# Altium PCB CAMERA_SHEILD_PCB.PcbDoc
Units mil, origin at the board's own origin, x right, y up, seen from the top; angles counter-clockwise.
Board outline 1750 x 2100 mil, 2 copper layers (Top Layer, Bottom Layer); 31 components, 29 nets, 109 pads, 36 vias.
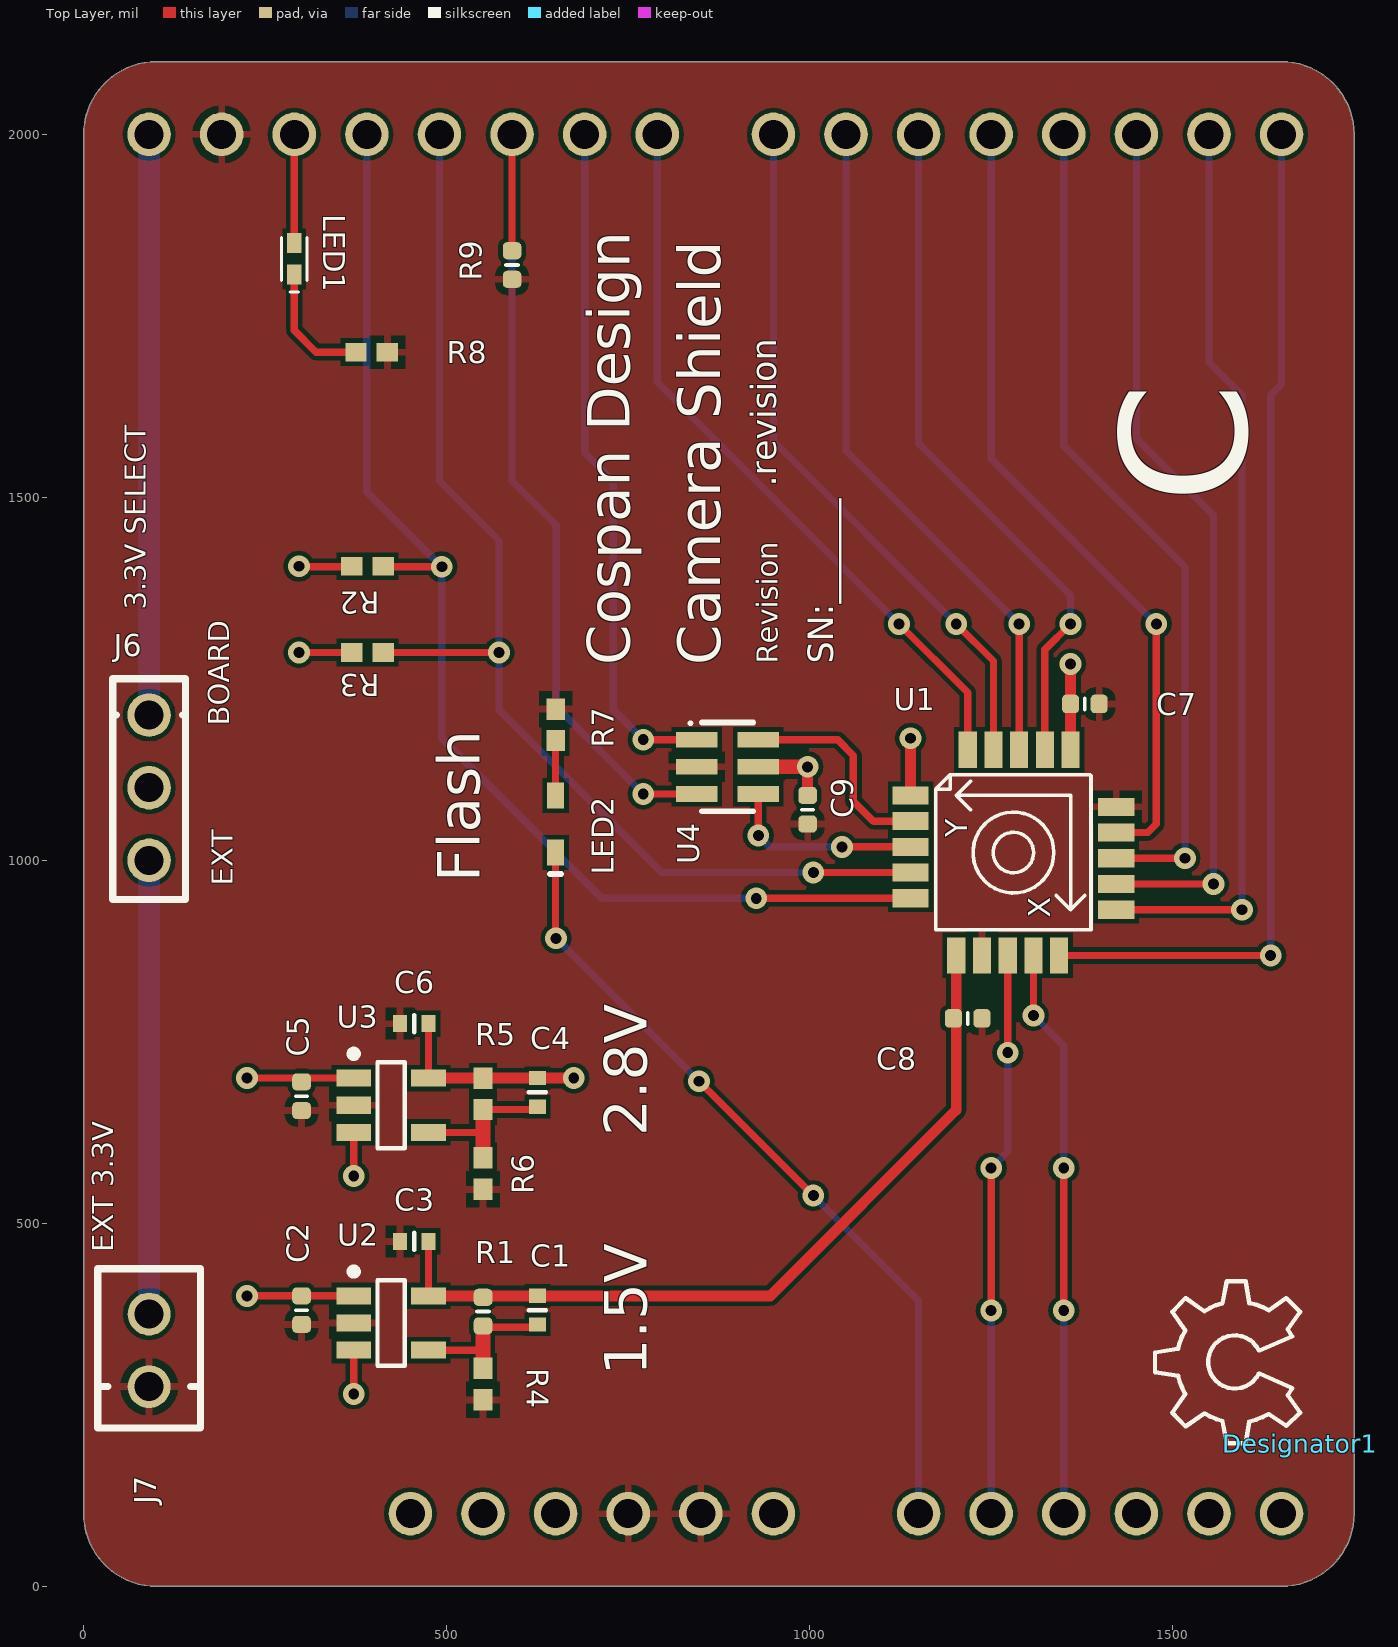
[diagram p0: Top Layer view]
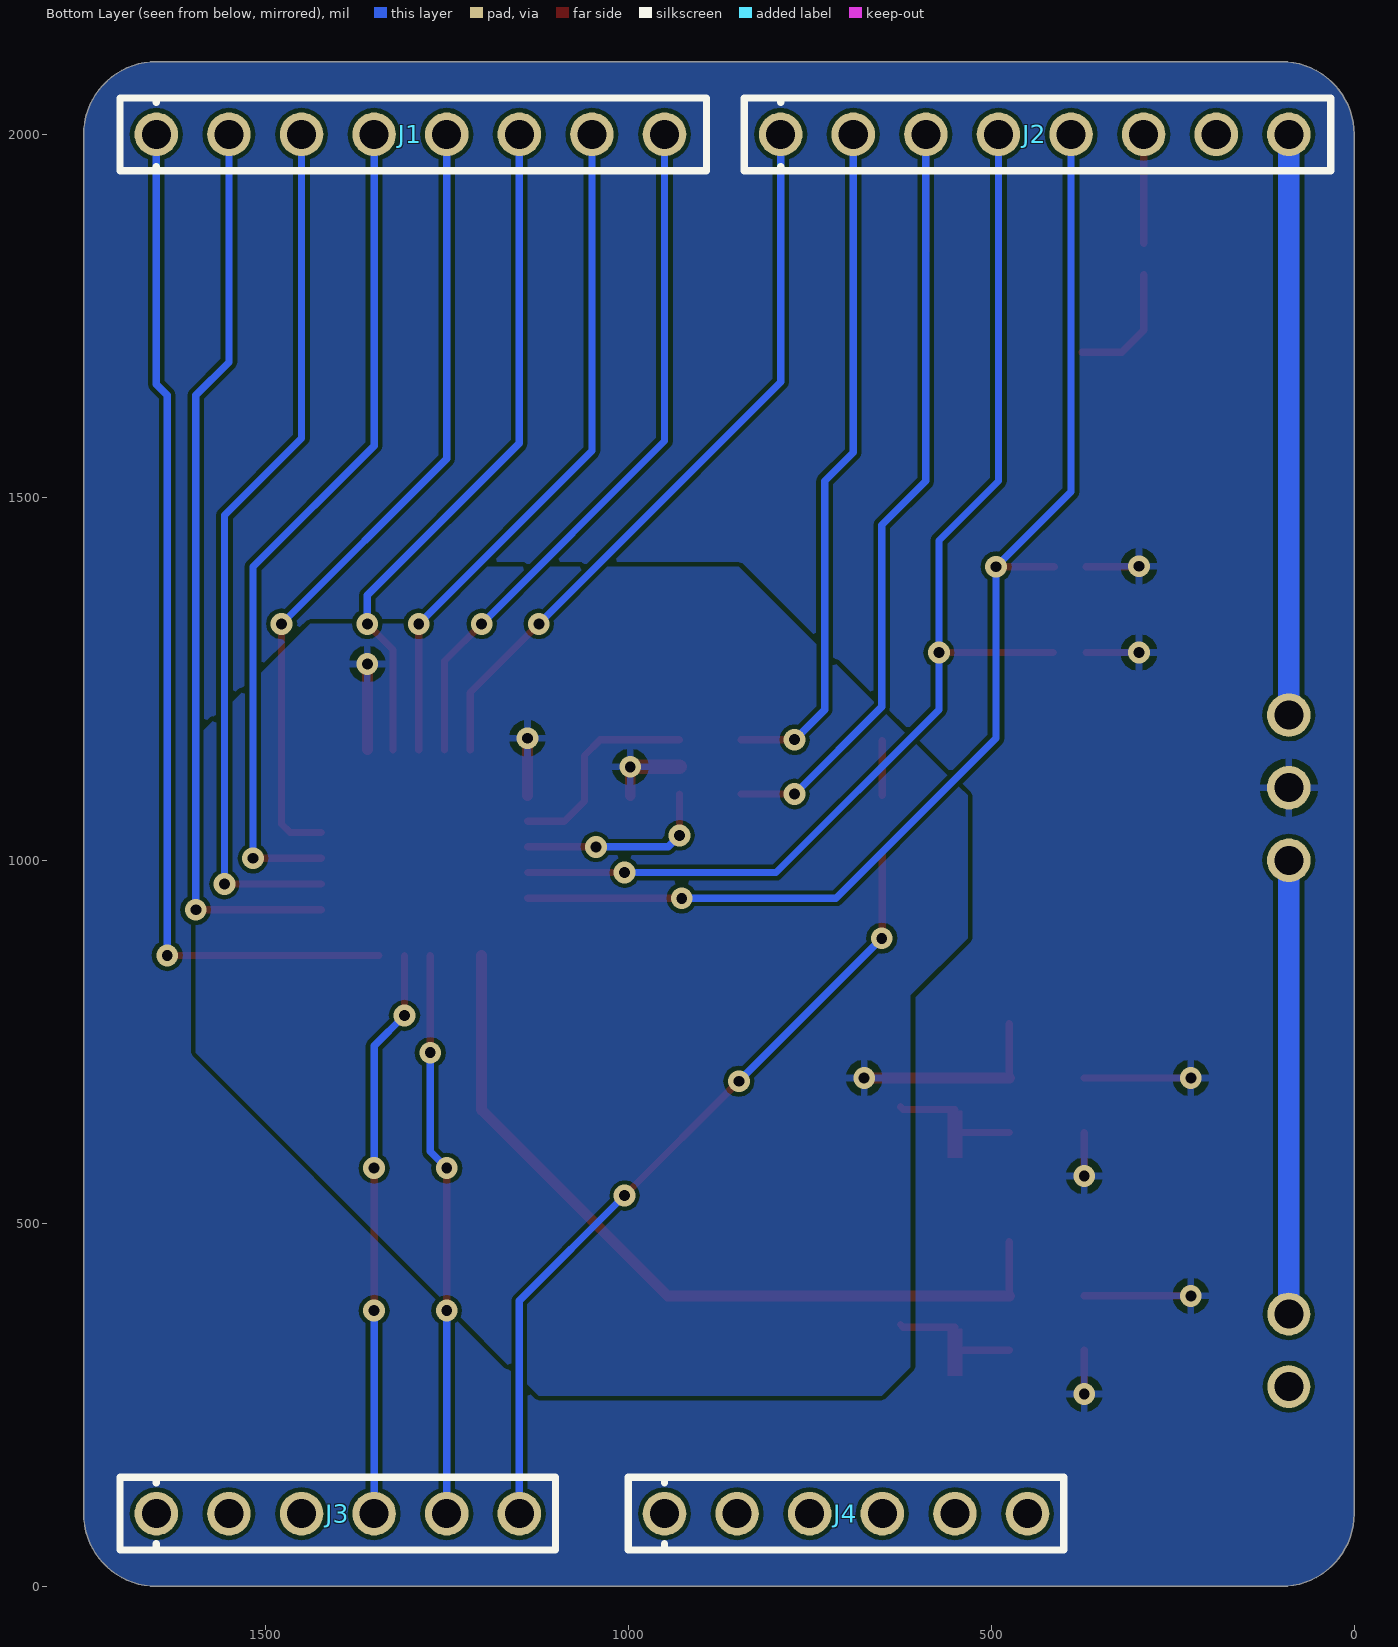
[diagram p1: Bottom Layer view, seen from below]
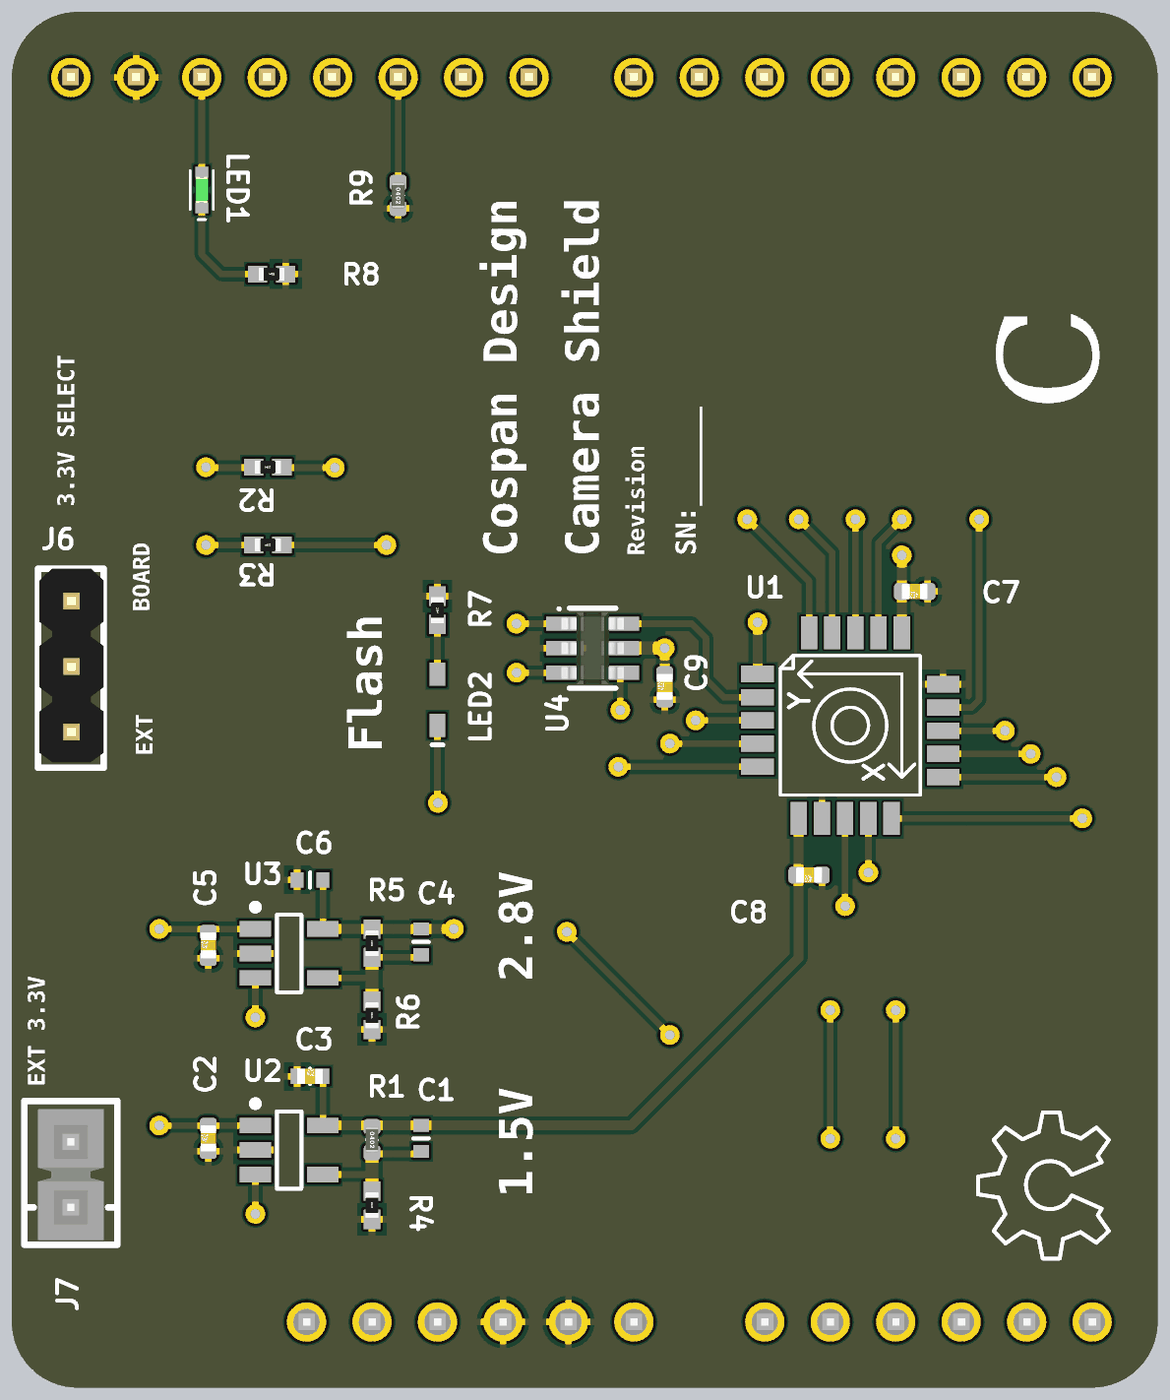
[diagram p2: 3D render of the assembled board from above, using the file's embedded part models]
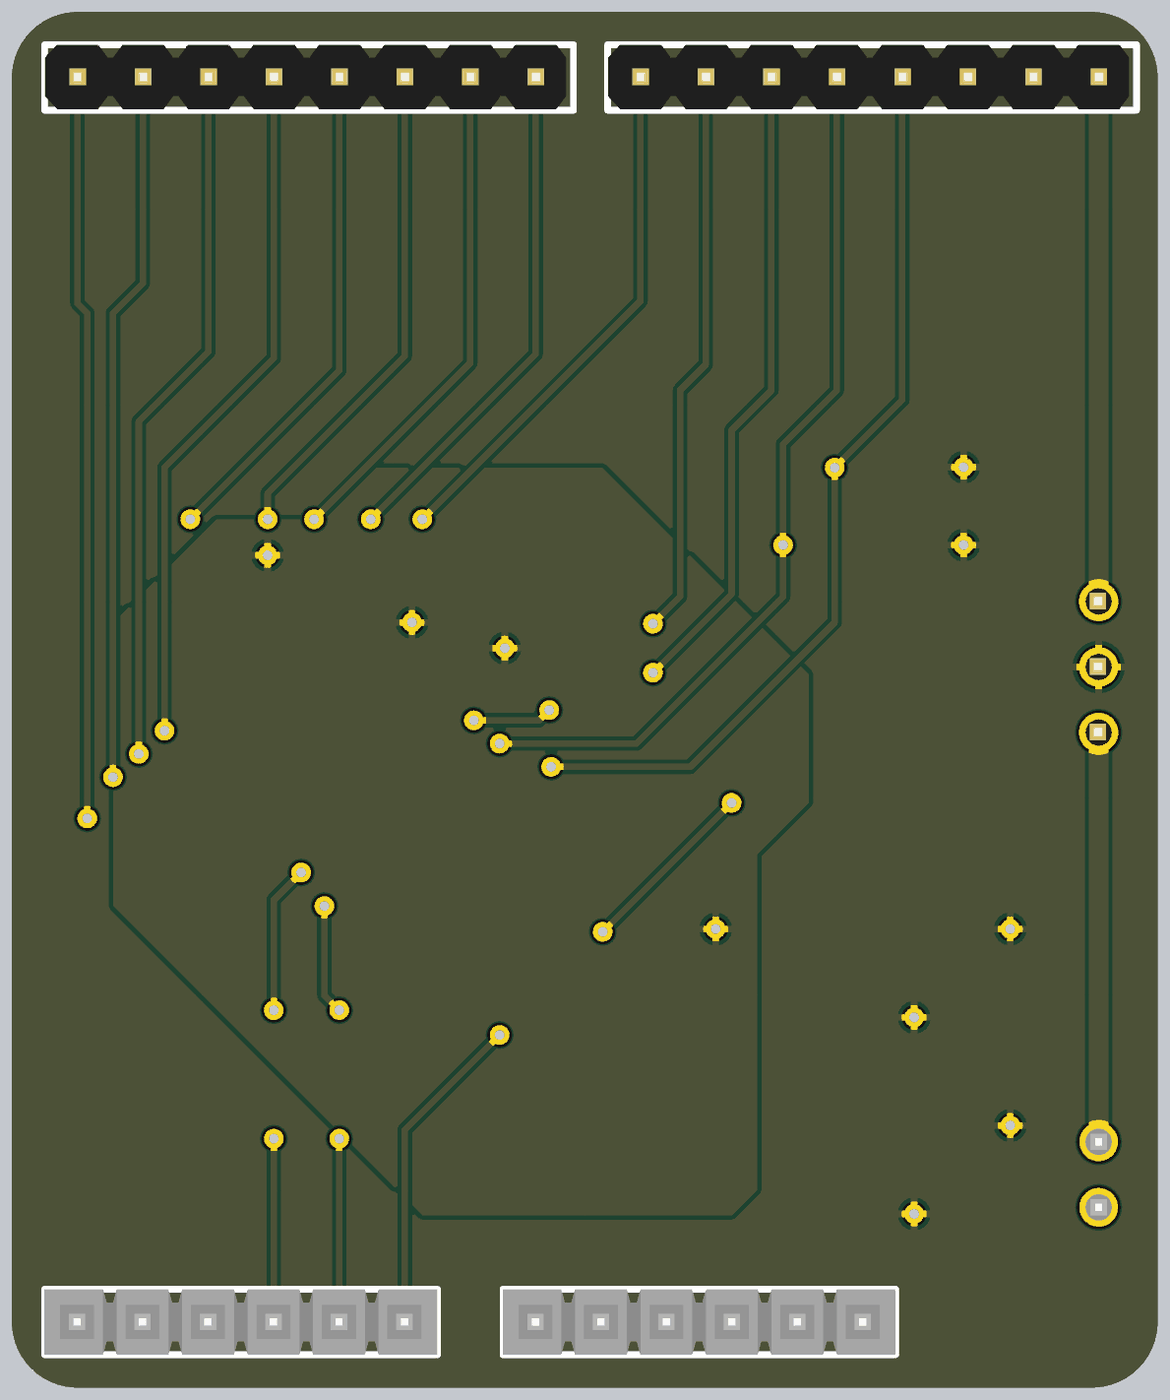
[diagram p3: 3D render of the assembled board from below, using the file's embedded part models]

## Layer stack, top to bottom
Top Layer: signal copper 1.4
Dielectric: dielectric 12.6, FR-4, Dk 4.8
Bottom Layer: signal copper 1.4

## Board outline
0,100 0,2000 cw(c100,2000) 100,2100 1650,2100 cw(c1650,2000) 1750,2000 1750,100 cw(c1650,100) 1650,0 100,0 cw(c100,100)

## Design rules (kind name [scope] priority, off if disabled: settings)
Clearance [All] p1: gap=6
MinimumSolderMaskSliver [All] p1: minsoldermaskwidth=3
PolygonConnect [All] p1: connectstyle=Relief reliefconductorwidth=10 reliefentries=4 polygonreliefangle="90 Angle" airgapwidth=10
RoutingVias [All] p1: holewidth=15 width=30 viastyle="Through Hole" minholewidth=15 minwidth=30 maxholewidth=28 maxwidth=50
SilkToSilkClearance [All] p1: silktosilkclearance=5
SilkToSolderMaskClearance SilkscreenOverComponentPads [IsPad] p1: minsilkscreentomaskgap=3 clearancetoexposedcopper=TRUE
SolderMaskExpansion [All] p1: expansion=4
Width [All] p1: maxlimit=50 minlimit=6 preferedwidth=6
25 further rules are at their usual default settings.

## Components (designator, comment, footprint, x,y, rotation, side; value= is the part's Value field where it differs from the comment)
C1 "1000pF" C_ERA-0402 625,380.31 r90 top
C2 "0.1uF" C_0402 300,380.31 r90 top
C3 "2.2uF" C_ERA-0402 455.31,475 r0 top
C4 "1000pF" C_ERA-0402 625,680.31 r90 top
C5 "0.1uF" C_0402 300,675 r90 top
C6 "2.2uF" C_ERA-0402 455.31,775 r0 top
C7 "0.1uF" C_0402 1379.06,1215.35 r180 top
C8 "0.1uF" C_0402 1217.64,782.28 r180 top
C9 "0.1uF" C_0402 997.17,1069.69 r90 top
Designator1 "Comment" OSHW_6X200_NOTEXT 1675.59,196.97 r90 top (schematic designator U$5)
J1 "J_HDR1X8_THRHOLE_VERT" HDR_1X8 1650,2000 r180 bottom locked
J2 "J_HDR1X8_THRHOLE_VERT" HDR_1X8 790,2000 r180 bottom locked
J3 "J_HDR1X6_THRHOLE_VERT" HDR_1X6 1650,100 r180 bottom locked
J4 "J_HDR1X6_THRHOLE_VERT" HDR_1X6 950,100 r180 bottom locked
J6 "J_HDR1X3_JUMPER_SELECT" HDR_1X3 90,1200 r270 top
J7 "J_HDR1X2_JUMPER" HDR_1X2 90,275 r90 top
LED1 "LED_GRN_0402" DIOM1005X07L_GREEN 290,1828.35 r90 top
LED2 "LED_WHITE_0603" DIOM0603 650,1050 r270 top
R1 "R_0402_7.87K" R_0402 550,378.35 r270 top
R2 "2.2k Ohms" ERA-0402 390.87,1405.04 r0 top
R3 "2.2k Ohms" ERA-0402 390.87,1286.22 r0 top
R4 "R_0402_10.0K" ERA-0402 550,278.35 r270 top
R5 "R_0402_13.7K" ERA-0402 550,678.35 r270 top
R6 "R_0402_10.0K" ERA-0402 550,568.35 r270 top
R7 "R_0402_22.0" ERA-0402 650,1186.65 r90 top
R8 "1.0k Ohms" ERA-0402 396.65,1700 r0 top
R9 "R_0402_10.0K" R_0402 590,1820 r270 top
U1 "640X480 Camera" TCM8230MD 1280.63,1010.63 r90 top
U2 "VREG" SOT95P280X90-5N 423.43,362.6 r0 top
U3 "VREG" SOT95P280X90-5N 423.43,662.6 r0 top
U4 "2 X BUFFER" SOT23-6 886.93,1128.74 r270 top

## Footprints (in the part's own frame and the unit in brackets; to place one, negate y for a bottom-side part, rotate by r counter-clockwise, add the part's x,y. Pads: shape width x height; smd on the part's side, far side on the other; paste and mask are expansions set on the pad)
C_0402 [mm] "Capacitor 0402"
  rrect50% 0.6x0.65 smd: 1(-0.5,0) 2(0.5,0)
  silkscreen extent 0,-0.2 0,0.2, body extent -0.5,-0.3 0.5,0.3, height 0.2
C_ERA-0402 [mm]
  rect 0.5x0.6 smd: 1(-0.5,0) 2(0.5,0)
  silkscreen extent 0,-0.3 0,0.3, body extent -0.51,-0.3 0.51,0.3, height 0.2
DIOM0603 [mm] "Molded Diode, 2-Leads, Body 1.2x0.8mm, IPC Medium Density"
  rect 0.9x0.6 smd: 1(-1,0) 2(1,0)
  silkscreen extent 1.75,-0.2 1.75,0.2, body extent -0.65,-0.45 0.65,0.45, height 0.7
DIOM1005X07L_GREEN [mm] "Molded Diode, 2-Leads, Body 1.0x0.5mm, IPC High Density"
  rect 0.7x0.5 smd: 1(0.55,0) 2(-0.55,0)
  silkscreen extent -1.15,-0.45 0.75,0.45, body extent -0.5,-0.25 0.51,0.25, height 0.45
ERA-0402 [mm] "Chip Resistor, 2-Leads, Body 1.0x0.5mm, IPC Medium Density"
  rect 0.75x0.65 smd: 1(-0.55,0) 2(0.55,0)
  body extent -0.5,-0.25 0.5,0.25, height 0.33
HDR_1X2 [mm] "Jumper"
  round 1.5 hole 1.016: 1(0,0) 2(2.54,0)
  silkscreen extent -1.45,-1.8 4.13,1.8, body extent -1.27,-1.27 3.81,1.27, height 8.38
HDR_1X3 [mil] "HEADER"
  round 60 hole 40: 1(0,0) 2(100,0) 3(200,0)
  silkscreen extent -50,-50 254,50, body extent -51,-48 245,50, height 329
HDR_1X6 [mil] "HEADER"
  round 60 hole 40: 1(0,0) 2(100,0) 3(200,0) 4(300,0) 5(400,0) 6(500,0)
  silkscreen extent -50,-50 550,50, body extent -50,-50 550,50, height 334
HDR_1X8 [mil] "HEADER"
  round 60 hole 40: 1(0,0) 2(100,0) 3(200,0) 4(300,0) 5(400,0) 6(500,0) 7(600,0) 8(700,0)
  silkscreen extent -50,-50 758,50, body extent -50,-48 746,50, height 329
OSHW_6X200_NOTEXT [mil]
  silkscreen extent 0,0 223,200
R_0402 [mm] "Resistor 0402"
  rrect50% 0.6x0.65 smd: 1(-0.5,0) 2(0.5,0)
  silkscreen extent 0,-0.2 0,0.2, body extent -0.51,-0.25 0.51,0.25, height 0.51
SOT23-6 [mm] "SOT-23/SC-74A; 6 Leads; Body 3 x 3 mm, inc. leads (LxW max)"
  rect 0.55x1.45 smd: 1(-0.95,-1.075) 2(0,-1.075) 3(0.95,-1.075) 4(0.95,1.075) 5(0,1.075) 6(-0.95,1.075)
  silkscreen extent -1.57,-1.35 1.55,0.9, body extent -1.39,-1.2 1.4,1.22, height 1.09
SOT95P280X90-5N [mm] "SOT23, 5-Leads, Body 3.0x2.8mm (max), Pitch 0.95mm, IPC Medium Density"
  rect 1.22x0.6 smd: 1(-1.31,0.95) 2(-1.31,0) 3(-1.31,-0.95) 4(1.31,-0.95) 5(1.31,0.95)
  silkscreen extent -1.43,-1.5 0.48,1.92, body extent -0.87,-1.5 0.87,1.5, height 0.9
TCM8230MD [mm]
  rect 0.635x1.27 smd mask+0.076: 1(2,3.6) 2(1.1,3.6) 3(0.2,3.6) 4(-0.7,3.6) 5(-1.6,3.6) 11(-2,-3.6) 12(-1.1,-3.6) 13(-0.2,-3.6) 14(0.7,-3.6) 15(1.6,-3.6)
  rect 1.27x0.635 smd mask+0.076: 6(-3.6,2) 7(-3.6,1.1) 8(-3.6,0.2) 9(-3.6,-0.7) 10(-3.6,-1.6) 16(3.6,-2) 17(3.6,-1.1) 18(3.6,-0.2) 19(3.6,0.7) 20(3.6,1.6)
  silkscreen extent -2.7,-2.72 2.72,2.72

## Part data
C1 C4: library part C_0402_1000PF_50V, "CAP CER 1000PF 50V C0G 0402"
C2 C5 C7 C8 C9: library part C_0402_0.1UF_16V, "CAP CER .10UF 16V X7R 0402"
C3 C6: library part C_0402_2.2UF, "CAP CER 2.2UF 6.3V X5R 0402"
J1 J2 J3 J4: "CONN HEADER .100\" 12POS TIN PCB"
J6: "CONN HEADER .100\" 3POS TIN PCB"
J7: "CONN HEADER .100\" 2POS TIN PCB"
LED1: "LED 1X0.5MM 570NM GN WTR CLR SMD"
LED2: "LED SMARTLED WHITE DIFF 0603 SMD"
R1: "RES 7.87K OHM 1/16W 1% 0402 SMD"
R2 R3: library part R_0402_2.2K, "RES 2.20K OHM 1/10W 1% 0402 SMD"
R4 R6 R9: "RES 10.0K OHM 1/16W 1% 0402 SMD"
R5: "RES 13.7K OHM 1/10W 1% 0402 SMD"
R7: "RES 22.0 OHM 1/16W 1% 0402 SMD"
R8: library part R_0402_1.0K, "RES 1.00K OHM 1/16W 1% 0402 SMD"
U1: library part U_TCM8230MD_CAMERA, "640 x 480 SPARKFUN CAMERA"
U2 U3: library part U_TPS79901DDCR, "IC REG LDO ADJ .2A TSOT-23-5"
U4: library part U_SN74LVC2G34DBVR, "IC BUFFER DUAL NON-INV SOT23-6"

## Via types
v1: diameter 30, hole 15, Top Layer to Bottom Layer, 36 vias

## Nets (pads, with @x,y where several pads share a name; then routed paths per layer and width w, separated by ;. In a path a pad name is that pad's centre, name@x,y a point inside that pad or via, vN(x,y) a via of type N, cw(c..) or ccw(c..) an arc to the next point about the centre after c; other vN are vias at no path point)
C\A\M\_\R\S\T\_\V\2\P\8\: U1.3 U4.4 | length 273.3
  Top Layer w10: v1(929.25,1034.25) U4.4 ; v1(1044.41,1018.5) U1.3
  Bottom Layer w10: v1(929.25,1034.25) 945,1018.5 v1(1044.41,1018.5)
CAM_CLK_IN: J2.2 U4.1 | length 941.1
  Top Layer w10: v1(770.79,1166.14) U4.1
  Bottom Layer w10: J2.2 690.08,1999.92 690.08,1561.81 729.45,1522.44 729.45,1207.48 v1(770.79,1166.14)
CAM_CLK_IN_V2P8: U1.2 U4.6 | length 293
  Top Layer w10: U4.6 1038.5,1166.14 1060.16,1144.49 1060.16,1081.5 1087.72,1053.94 U1.2
CAM_D0: J1.2 U1.11 | length 1260.2
  Top Layer w10: U1.11 v1(1595.59,931.89)
  Bottom Layer w10: J1.2 1550,1686.14 1595.59,1640.55 v1(1595.59,931.89)
CAM_D1: J1.3 U1.12 | length 1210.5
  Top Layer w10: U1.12 v1(1556.22,967.32)
  Bottom Layer w10: J1.3 1450,1581.42 1556.22,1475.2 v1(1556.22,967.32)
CAM_D2: J1.4 U1.13 | length 1160.8
  Top Layer w10: U1.13 v1(1516.85,1002.76)
  Bottom Layer w10: J1.4 1350,1571.18 1516.85,1404.33 v1(1516.85,1002.76)
CAM_D3: J1.5 U1.14 | length 1104.2
  Top Layer w10: U1.14 1465.67,1038.19 1477.48,1050 v1(1477.48,1325.59)
  Bottom Layer w10: J1.5 1250,1553.07 v1(1477.48,1325.59)
CAM_D4: J1.6 U1.17 | length 949
  Top Layer w10: U1.17 1323.94,1290.16 v1(1359.37,1325.59)
  Bottom Layer w10: J1.6 1150,1574.33 1359.37,1364.96 v1(1359.37,1325.59)
CAM_D5: J1.7 U1.18 | length 946.4
  Top Layer w10: U1.18 v1(1288.5,1325.59)
  Bottom Layer w10: J1.7 1050,1564.09 v1(1288.5,1325.59)
CAM_D6: J1.8 U1.19 | length 973.2
  Top Layer w10: v1(1201.89,1325.59) 1253.07,1274.41 U1.19
  Bottom Layer w10: J1.8 950,1577.48 v1(1201.89,1325.59)
CAM_D7: J2.1 U1.20 | length 1024.8
  Top Layer w10: v1(1123.15,1325.59) 1217.64,1231.1 U1.20
  Bottom Layer w10: J2.1 790,1658.74 v1(1123.15,1325.59)
CAM_HSYNC: J3.4 U1.9 | length 786.2
  Top Layer w10: v1(1308.19,786.22) U1.9 ; v1(1350,379.84) v1(1350,576.06)
  Bottom Layer w10: v1(1308.19,786.22) 1350,744.41 v1(1350,576.06) ; J3.4 v1(1350,379.84)
CAM_PIXCLK: J1.1 U1.10 | length 1428.7
  Top Layer w10: U1.10 v1(1634.96,868.9)
  Bottom Layer w10: v1(1634.96,868.9) 1634.96,1640.55 1650,1655.59 J1.1
CAM_RST: J2.3 R9.1 U4.3 | length 1217.7
  Top Layer w10: R9.1 J2.3 ; v1(770.79,1091.34) U4.3
  Bottom Layer w10: J2.3 590,1522.44 650.71,1461.73 650.71,1211.42 v1(770.79,1091.34)
CAM_VSYNC: J3.5 U1.8 | length 778.3
  Top Layer w10: v1(1250,379.84) v1(1250,576.06) ; v1(1272.76,735.04) U1.8
  Bottom Layer w10: J3.5 v1(1250,379.84) ; v1(1250,576.06) 1272.76,598.82 v1(1272.76,735.04)
CAMERA_FLASH: J3.6 LED2.2 | length 1117.4
  Top Layer w10: v1@650,892.52 LED2.2 ; v1(847.56,695.67) v1(1005.04,538.19)
  Bottom Layer w10: v1(650.71,892.52) v1(847.56,695.67) ; v1(1005.04,538.19) 1150,393.23 J3.6
CAMERA_LED: J2.6 LED1.1 | length 150
  Top Layer w10: LED1.1 J2.6
GND: C2.1 C3.1 C5.1 C6.1 C7.1 C8.1 C9.1 J2.7 J4.2 J4.3 J7.1 R4.2 R6.2 R7.2 R8.2 R9.2 U1.7 U1.15 U2.2 U3.2 U4.2
I2C_SCL: J2.4 R3.2 U1.4 | length 1644
  Top Layer w10: R3.2@414.37,1286.22 v1(571.97,1286.22) ; v1(1005.04,983.07) U1.4
  Bottom Layer w10: J2.4 490,1522.44 571.97,1440.47 571.97,1207.48 796.38,983.07 v1(1005.04,983.07)
I2C_SDA: J2.5 R2.2 U1.5 | length 1692.2
  Top Layer w10: R2.2@412.72,1404.33 v1(493.23,1404.33) ; v1(926.3,947.64) U1.5
  Bottom Layer w10: J2.5 390,1507.56 v1(493.23,1404.33) 493.23,1168.11 713.7,947.64 v1(926.3,947.64)
NetC1_1: C1.1 R1.2 R4.1 U2.4 | length 151.6
  Top Layer w10: U2.4 550,325.2 ; R1.2@550,356.69 621.06,356.69 C1.1
NetC4_1: C4.1 R5.2 R6.1 U3.4 | length 151.6
  Top Layer w10: U3.4 550,625.2 ; R5.2 621.06,656.69 C4.1
NetJ6_3: J6.3 J7.2 | length 625
  Bottom Layer w30: J7.2 J6.3
NetLED1_2: LED1.2 R8.1 | length 174.1
  Top Layer w10: LED1.2 290,1730 320,1700 R8.1
NetLED2_1: LED2.1 R7.1 | length 75.6
  Top Layer w10: LED2.1 R7.1
V1P5: C1.2 C3.2 C8.2 R1.1 U1.6 U2.5 | length 1120.7
  Top Layer w10: U2.5 C3.2
  Top Layer w15: U2.5 945.59,400 1201.89,656.3 U1.6
V2P8: C4.2 C6.2 C7.2 C9.2 R5.1 U1.1 U1.16 U3.5 U4.5 | length 579.1
  Top Layer w10: U3.5 C6.2
  Top Layer w15: U3.5 v1(675,700) ; C9.2 v1(997.17,1128.74) ; U1.1 v1(1138.9,1168.11) ; U1.16 v1(1359.37,1270.47)
  Top Layer w20: U4.5 v1(997.17,1128.74)
V3P3: C2.2 C5.2 J6.2 R2.1 R3.1 U2.1 U2.3 U3.1 U3.3 | length 577.4
  Top Layer w10: v1(225,400) U2.1 ; v1(225,700) U3.1 ; v1(296.38,1286.22) R3.1 ; v1(296.38,1405.04) 288.43,1405.04 287.72,1404.33 R2.1@369.21,1404.33 ; v1(371.85,265) U2.3 ; v1(371.85,565) U3.3
V3P3_DIONYSUS: J2.8 J6.1 | length 800
  Bottom Layer w30: J6.1 J2.8
pads on no net: J3.1 J3.2 J3.3 J4.1 J4.4 J4.5 J4.6

## Polygon pours and split planes (outlines as drawn)
GND on Top Layer "GROUND" (solid, pour order 6): 0,100 0,2000 cw(c100,2000) 100,2100 1650,2100 cw(c1650,2000) 1750,2000 1750,100 cw(c1650,100) 1650,0 100,0 cw(c100,100)
V2P8 on Bottom Layer "V2P8_PLANE" (solid, pour order 5): 611.34,735.04 611.34,813.78 532.6,892.52 532.6,1089.37 847.56,1404.33 1201.89,1404.33 1280.63,1325.59 1438.11,1325.59 1595.59,1168.11 1595.59,735.04 1123.15,262.6 650.71,262.6 611.34,301.97
V3P3 on Bottom Layer "V3P3_PLANE" (solid, pour order 11): 0,100 0,2000 cw(c100,2000) 100,2100 1650,2100 cw(c1650,2000) 1750,2000 1750,100 cw(c1650,100) 1650,0 100,0 cw(c100,100)

## Other copper
Top Layer:
  region net NetC1_1: 540,355 540,290 560,290 560,355
  region net NetC4_1: 540,655 540,590 560,590 560,655

## Silkscreen, mask and mechanical layers (free items; w line width, h text height)
Top Overlay:
  text ".revision" at 965.67,1514.57 h60 r90
  text "C" at 1658.58,1490.94 h300 r90
  text "3.3V SELECT" at 95,1345 h50 r90
  text "Revision" at 965.67,1270.47 h50 r90
  text "SN:______" at 1044.41,1270.47 h60 r90
  text "Cospan Design" at 771.22,1268.39 h100 r90
  text "Camera Shield" at 896.22,1268.39 h100 r90
  text "BOARD" at 210,1185 h50 r90
  text "Flash" at 565,970 h100 r90
  text "EXT" at 215,965 h50 r90
  text "2.8V" at 795.09,620 h100 r90
  text "EXT 3.3V" at 50,460 h50 r90
  text "1.5V" at 795,290 h100 r90
Mechanical 2:
  the board outline again, w6

## Text inside footprints (layer, text, board x,y; h text height)
U1: Top Overlay "Y" at 1217.13,1031.69 h30 r90; Top Overlay "X" at 1331.14,921.18 h30 r90